# Altium PCB PCB1.PcbDoc (part 2 of 3)
Units mm, origin at the board's own origin, x right, y up, seen from the top; angles counter-clockwise.
Board outline 85 x 53 mm, 2 copper layers (Top Layer, Bottom Layer); 9 components, 0 nets, 22 pads, 70 vias.
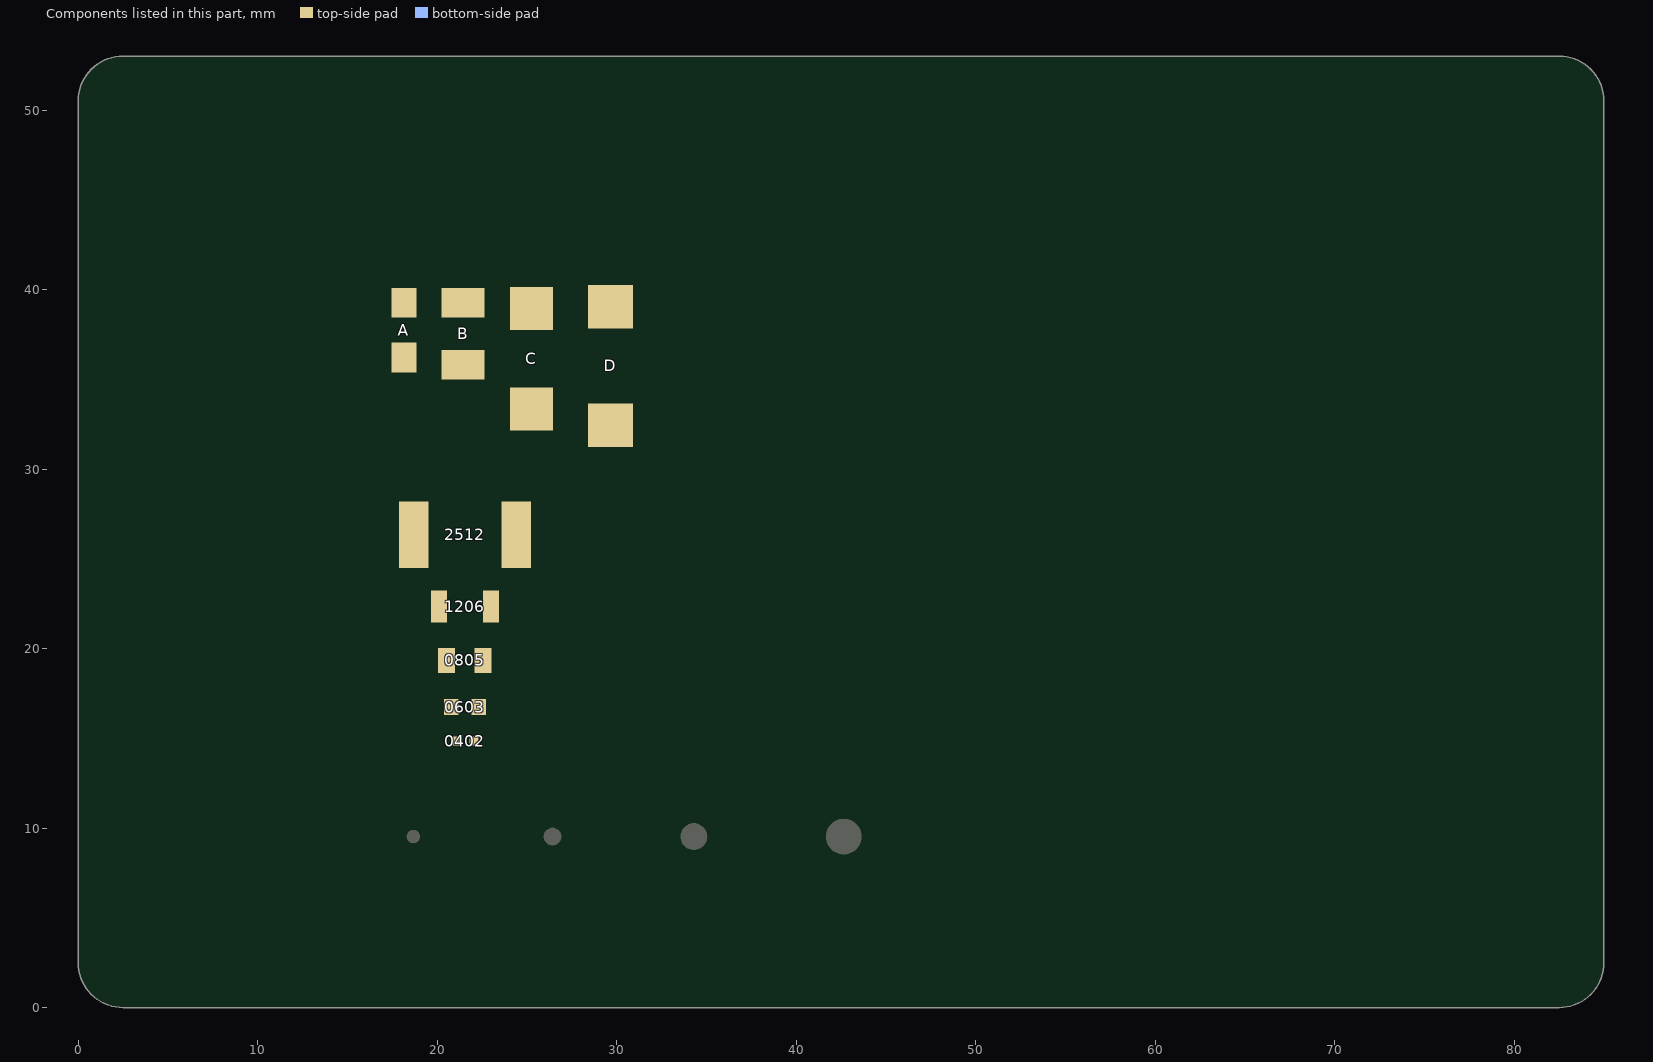
[diagram p2: the components of this part, seen from the top]

## Via types
v1: diameter 1.5, hole 0.9, Top Layer to Bottom Layer, 40 vias
v2: diameter 1.5, hole 1.1, Top Layer to Bottom Layer, 4 vias
v3: diameter 1.1, hole 1.1, Top Layer to Bottom Layer, 2 vias
v4: diameter 2.7, hole 2.2, Top Layer to Bottom Layer, 1 vias
v5: diameter 5.8, hole 5.3, Top Layer to Bottom Layer, 1 vias
v6: diameter 4.8, hole 4.3, Top Layer to Bottom Layer, 1 vias
v7: diameter 3.7, hole 3.2, Top Layer to Bottom Layer, 1 vias
v8: diameter 3.2, hole 2.7, Top Layer to Bottom Layer, 1 vias
v9: diameter 0.8, hole 0.3, Top Layer to Bottom Layer, 1 vias
v10: diameter 0.9, hole 0.4, Top Layer to Bottom Layer, 1 vias
v11: diameter 1, hole 0.5, Top Layer to Bottom Layer, 1 vias
v12: diameter 1.1, hole 0.6, Top Layer to Bottom Layer, 1 vias
v13: diameter 1.2, hole 0.7, Top Layer to Bottom Layer, 1 vias
v14: diameter 1.3, hole 0.8, Top Layer to Bottom Layer, 1 vias
v15: diameter 1.4, hole 0.9, Top Layer to Bottom Layer, 1 vias
v16: diameter 1.5, hole 1, Top Layer to Bottom Layer, 1 vias
v17: diameter 1.6, hole 1.1, Top Layer to Bottom Layer, 1 vias
v18: diameter 1.7, hole 1.2, Top Layer to Bottom Layer, 1 vias
v19: diameter 1.8, hole 1.3, Top Layer to Bottom Layer, 1 vias
v20: diameter 1.9, hole 1.4, Top Layer to Bottom Layer, 1 vias
v21: diameter 1.9, hole 1.5, Top Layer to Bottom Layer, 1 vias
v22: diameter 2.1, hole 1.6, Top Layer to Bottom Layer, 1 vias
v23: diameter 2.2, hole 1.7, Top Layer to Bottom Layer, 1 vias
v24: diameter 2.3, hole 1.8, Top Layer to Bottom Layer, 1 vias
v25: diameter 2.5, hole 2, Top Layer to Bottom Layer, 1 vias
v26: diameter 2.4, hole 1.9, Top Layer to Bottom Layer, 1 vias
v27: diameter 6.9, hole 6.4, Top Layer to Bottom Layer, 1 vias

## Nets (pads, with @x,y where several pads share a name; then routed paths per layer and width w, separated by ;. In a path a pad name is that pad's centre, name@x,y a point inside that pad or via, vN(x,y) a via of type N, cw(c..) or ccw(c..) an arc to the next point about the centre after c; other vN are vias at no path point) (continued)
copper on no net: (continued)
  Bottom Layer w0.05: 8.086,18.326 8.213,18.326 ; 8.086,18.351 8.213,18.351 ; 8.086,18.377 8.213,18.377 ; 8.086,18.402 8.213,18.402 ; 8.086,18.428 8.213,18.428 ; 8.086,18.453 8.238,18.453 ; 8.086,18.478 8.289,18.478 ; 8.086,18.504 8.34,18.504 ; 8.086,18.529 8.416,18.529 ; 8.086,18.555 8.187,18.555 ; 8.086,18.58 8.187,18.58 ; 8.086,18.605 8.187,18.605 ; 8.086,18.631 8.213,18.631 ; 8.086,18.656 8.213,18.656 ; 8.086,18.682 8.213,18.682 ; 8.086,18.707 8.213,18.707 ; 8.111,18.174 8.238,18.174 ; 8.111,18.199 8.238,18.199 ; 8.111,18.224 8.213,18.224 ; 8.111,18.25 8.213,18.25 ; 8.111,18.275 8.213,18.275 ; 8.111,18.301 8.213,18.301 ; 8.111,18.732 8.213,18.732 ; 8.111,18.758 8.213,18.758 ; 8.111,18.783 8.213,18.783 ; 8.111,18.809 8.213,18.809 ; 8.111,18.834 8.238,18.834 ; 8.111,18.859 8.238,18.859 ; 8.111,18.885 8.238,18.885 ; 8.136,18.047 8.263,18.047 ; 8.136,18.072 8.263,18.072 ; 8.136,18.097 8.238,18.097 ; 8.136,18.123 8.238,18.123 ; 8.136,18.148 8.238,18.148 ; 8.136,18.91 8.238,18.91 ; 8.136,18.936 8.238,18.936 ; 8.136,18.961 8.263,18.961 ; 8.136,18.986 8.263,18.986 ; 8.162,17.945 8.289,17.945 ; 8.162,17.97 8.289,17.97 ; 8.162,17.996 8.289,17.996 ; 8.162,18.021 8.263,18.021 ; 8.162,19.012 8.263,19.012 ; 8.162,19.037 8.263,19.037 ; 8.162,19.063 8.289,19.063 ; 8.162,19.088 8.289,19.088 ; 8.187,17.869 8.39,17.869 ; 8.187,17.894 8.416,17.894 ; 8.187,17.92 8.467,17.92 ; 8.187,19.113 8.289,19.113 ; 8.187,19.139 8.314,19.139 ; 8.187,19.164 8.416,19.164 ; 8.213,17.793 8.34,17.793 ; 8.213,17.818 8.34,17.818 ; 8.213,17.843 8.365,17.843 ; 8.213,18.555 8.848,18.555 ; 8.213,19.19 8.771,19.19 ; 8.213,19.215 8.721,19.215 ; 8.213,19.24 8.67,19.24 ; 8.238,17.742 8.365,17.742 ; 8.238,17.767 8.365,17.767 ; 8.238,19.266 8.365,19.266 ; 8.238,19.291 8.365,19.291 ; 8.263,17.691 8.39,17.691 ; 8.263,17.716 8.39,17.716 ; 8.263,18.58 8.873,18.58 ; 8.263,19.317 8.39,19.317 ; 8.263,19.342 8.39,19.342 ; 8.263,19.367 8.416,19.367 ; 8.289,17.615 8.441,17.615 ; 8.289,17.64 8.416,17.64 ; 8.289,17.666 8.416,17.666 ; 8.289,19.393 8.416,19.393 ; 8.289,19.418 8.441,19.418 ; 8.314,17.564 8.467,17.564 ; 8.314,17.589 8.441,17.589 ; 8.314,17.945 8.492,17.945 ; 8.314,18.605 8.67,18.605 ; 8.314,19.444 8.441,19.444 ; 8.314,19.469 8.467,19.469 ; 8.34,17.539 8.467,17.539 ; 8.34,17.97 8.568,17.97 ; 8.34,19.494 8.467,19.494 ; 8.34,19.52 8.492,19.52 ; 8.365,17.488 8.492,17.488 ; 8.365,17.513 8.492,17.513 ; 8.365,19.545 8.492,19.545 ; 8.365,19.571 8.517,19.571 ; 8.39,17.437 8.543,17.437 ; 8.39,17.462 8.517,17.462 ; 8.39,17.996 8.644,17.996 ; 8.39,19.596 8.517,19.596 ; 8.416,17.386 8.568,17.386 ; 8.416,17.412 8.543,17.412 ; 8.416,18.021 8.975,18.021 ; 8.416,19.621 8.543,19.621 ; 8.416,19.647 8.568,19.647 ; 8.441,17.361 8.721,17.361 ; 8.441,18.631 8.543,18.631 ; 8.441,19.672 8.568,19.672 ; 8.441,19.698 8.594,19.698 ; 8.467,17.31 8.695,17.31 ; 8.467,17.335 8.695,17.335 ; 8.467,18.047 8.949,18.047 ; 8.467,19.723 8.619,19.723 ; 8.492,17.285 8.67,17.285 ; 8.492,19.748 8.619,19.748 ; 8.492,19.774 8.644,19.774 ; 8.517,17.234 8.67,17.234 ; 8.517,17.259 8.644,17.259 ; 8.517,19.799 8.975,19.799 ; 8.543,17.208 8.695,17.208 ; 8.543,18.072 8.797,18.072 ; 8.543,19.825 8.924,19.825 ; 8.543,19.85 8.848,19.85 ; 8.568,17.158 8.721,17.158 ; 8.568,17.183 8.721,17.183 ; 8.568,19.164 8.797,19.164 ; 8.568,19.875 8.721,19.875 ; 8.594,17.132 8.746,17.132 ; 8.594,18.529 8.848,18.529 ; 8.594,19.901 8.746,19.901 ; 8.619,17.107 8.771,17.107 ; 8.619,17.386 8.746,17.386 ; 8.619,17.412 8.771,17.412 ; 8.619,19.926 8.746,19.926 ; 8.619,19.952 8.771,19.952 ; 8.644,17.056 8.822,17.056 ; 8.644,17.081 8.797,17.081 ; 8.644,17.437 8.797,17.437 ; 8.644,19.977 8.797,19.977 ; 8.67,17.031 8.822,17.031 ; 8.67,17.462 8.848,17.462 ; 8.67,18.504 8.848,18.504 ; 8.67,19.139 8.848,19.139 ; 8.67,20.002 8.822,20.002 ; 8.695,17.005 8.848,17.005 ; 8.695,17.488 8.898,17.488 ; 8.695,19.113 9.025,19.113 ; 8.695,20.028 8.848,20.028 ; 8.695,20.053 8.873,20.053 ; 8.721,16.98 8.873,16.98 ; 8.721,17.513 9,17.513 ; 8.721,17.996 8.975,17.996 ; 8.721,18.478 8.873,18.478 ; 8.721,20.079 8.873,20.079 ; 8.746,16.954 9,16.954 ; 8.746,18.428 8.873,18.428 ; 8.746,18.453 8.873,18.453 ; 8.746,18.605 8.873,18.605 ; 8.746,18.631 8.873,18.631 ; 8.746,19.088 9,19.088 ; 8.746,19.774 9.025,19.774 ; 8.746,20.104 8.898,20.104 ; 8.771,16.904 8.975,16.904 ; 8.771,16.929 8.975,16.929 ; 8.771,17.539 9.229,17.539 ; 8.771,18.25 8.898,18.25 ; 8.771,18.275 8.898,18.275 ; 8.771,18.301 8.898,18.301 ; 8.771,18.326 8.873,18.326 ; 8.771,18.351 8.873,18.351 ; 8.771,18.377 8.873,18.377 ; 8.771,18.402 8.873,18.402 ; 8.771,18.656 8.873,18.656 ; 8.771,18.682 8.873,18.682 ; 8.771,18.707 8.873,18.707 ; 8.771,18.732 8.873,18.732 ; 8.771,18.758 8.898,18.758 ; 8.771,18.783 8.898,18.783 ; 8.771,18.809 8.898,18.809 ; 8.771,19.063 9,19.063 ; 8.771,20.129 8.924,20.129 ; 8.797,16.878 8.949,16.878 ; 8.797,17.97 9,17.97 ; 8.797,18.148 8.924,18.148 ; 8.797,18.174 8.924,18.174 ; 8.797,18.199 8.924,18.199 ; 8.797,18.224 8.898,18.224 ; 8.797,18.834 8.898,18.834 ; 8.797,18.859 8.924,18.859 ; 8.797,18.885 8.924,18.885 ; 8.797,18.91 8.924,18.91 ; 8.797,19.037 8.975,19.037 ; 8.797,20.155 8.949,20.155 ; 8.822,16.853 8.949,16.853 ; 8.822,17.564 9.203,17.564 ; 8.822,18.072 8.949,18.072 ; 8.822,18.097 8.949,18.097 ; 8.822,18.123 8.924,18.123 ; 8.822,18.936 8.949,18.936 ; 8.822,18.961 8.949,18.961 ; 8.822,18.986 8.949,18.986 ; 8.822,19.012 8.975,19.012 ; 8.822,20.18 8.975,20.18 ; 8.848,13.297 8.975,13.297 ; 8.848,13.322 8.975,13.322 ; 8.848,13.348 8.949,13.348 ; 8.848,13.373 8.949,13.373 ; 8.848,13.398 8.975,13.398 ; 8.848,13.424 8.975,13.424 ; 8.848,16.802 8.975,16.802 ; 8.848,16.827 8.975,16.827 ; 8.848,17.945 9,17.945 ; 8.848,19.748 9.051,19.748 ; 8.848,20.206 9,20.206 ; 8.873,13.246 9.051,13.246 ; 8.873,13.271 9.025,13.271 ; 8.873,13.449 8.975,13.449 ; 8.873,13.475 9,13.475 ; 8.873,13.5 9,13.5 ; 8.873,16.751 9,16.751 ; 8.873,16.777 9,16.777 ; 8.873,17.92 9,17.92 ; 8.873,20.231 9.025,20.231 ; 8.898,13.221 9.102,13.221 ; 8.898,13.525 9.025,13.525 ; 8.898,13.551 9.051,13.551 ; 8.898,16.7 9.025,16.7 ; 8.898,16.726 9.025,16.726 ; 8.898,16.98 9.025,16.98 ; 8.898,17.005 9.051,17.005 ; 8.898,17.589 9.178,17.589 ; 8.898,17.869 9.025,17.869 ; 8.898,17.894 9.025,17.894 ; 8.898,19.139 9.025,19.139 ; 8.898,19.164 9.051,19.164 ; 8.898,19.723 9.102,19.723 ; 8.898,20.256 9.076,20.256 ; 8.924,13.195 9.178,13.195 ; 8.924,13.576 9.051,13.576 ; 8.924,13.602 9.076,13.602 ; 8.924,16.65 9.051,16.65 ; 8.924,16.675 9.051,16.675 ; 8.924,17.031 9.051,17.031 ; 8.924,17.818 9.051,17.818 ; 8.924,17.843 9.051,17.843 ; 8.924,19.19 9.051,19.19 ; 8.924,19.215 9.076,19.215 ; 8.924,20.282 9.102,20.282 ; 8.949,13.17 9.254,13.17 ; 8.949,13.627 9.102,13.627 ; 8.949,16.599 9.076,16.599 ; 8.949,16.624 9.076,16.624 ; 8.949,17.056 9.076,17.056 ; 8.949,17.767 9.076,17.767 ; 8.949,17.793 9.076,17.793 ; 8.949,19.24 9.076,19.24 ; 8.949,19.698 9.127,19.698 ; 8.949,20.307 9.152,20.307 ; 8.975,13.652 9.127,13.652 ; 8.975,13.678 9.127,13.678 ; 8.975,16.548 9.127,16.548 ; 8.975,16.573 9.102,16.573 ; 8.975,17.081 9.102,17.081 ; 8.975,17.716 9.102,17.716 ; 8.975,17.742 9.102,17.742 ; 8.975,19.266 9.102,19.266 ; 8.975,19.291 9.127,19.291 ; 8.975,20.333 9.432,20.333 ; 9,13.144 9.356,13.144 ; 9,13.703 9.152,13.703 ; 9,16.497 9.152,16.497 ; 9,16.523 9.127,16.523 ; 9,17.107 9.127,17.107 ; 9,17.666 9.152,17.666 ; 9,17.691 9.127,17.691 ; 9,19.317 9.127,19.317 ; 9,19.342 9.152,19.342 ; 9,19.672 9.127,19.672 ; 9,20.358 9.406,20.358 ; 9.025,13.729 9.178,13.729 ; 9.025,16.472 9.178,16.472 ; 9.025,17.132 9.178,17.132 ; 9.025,17.513 9.229,17.513 ; 9.025,17.615 9.178,17.615 ; 9.025,17.64 9.152,17.64 ; 9.025,19.367 9.178,19.367 ; 9.025,19.647 9.152,19.647 ; 9.051,13.119 9.483,13.119 ; 9.051,13.754 9.203,13.754 ; 9.051,16.421 9.406,16.421 ; 9.051,16.446 9.178,16.446 ; 9.051,17.158 9.203,17.158 ; 9.051,19.393 9.203,19.393 ; 9.051,19.621 9.178,19.621 ; 9.051,20.383 9.381,20.383 ; 9.076,13.779 9.254,13.779 ; 9.076,16.218 9.203,16.218 ; 9.076,16.243 9.203,16.243 ; 9.076,16.269 9.178,16.269 ; 9.076,16.294 9.178,16.294 ; 9.076,16.319 9.33,16.319 ; 9.076,16.345 9.356,16.345 ; 9.076,16.37 9.356,16.37 ; 9.076,16.396 9.381,16.396 ; 9.076,17.183 9.254,17.183 ; 9.076,19.418 9.203,19.418 ; 9.076,19.444 9.229,19.444 ; 9.076,19.571 9.356,19.571 ; 9.076,19.596 9.178,19.596 ; 9.076,20.409 9.305,20.409 ; 9.102,13.805 9.279,13.805 ; 9.102,16.142 9.254,16.142 ; 9.102,16.167 9.229,16.167 ; 9.102,16.192 9.203,16.192 ; 9.102,17.208 9.279,17.208 ; 9.102,17.488 9.254,17.488 ; 9.102,19.469 9.254,19.469 ; 9.102,19.494 9.66,19.494 ; 9.102,19.52 9.457,19.52 ; 9.102,19.545 9.406,19.545 ; 9.102,20.434 9.229,20.434 ; 9.102,20.46 9.229,20.46 ; 9.102,20.485 9.254,20.485 ; 9.127,13.094 9.635,13.094 ; 9.127,13.83 9.305,13.83 ; 9.127,16.116 9.33,16.116 ; 9.127,17.234 9.635,17.234 ; 9.127,17.462 9.279,17.462 ; 9.127,20.51 9.254,20.51 ; 9.127,20.536 9.279,20.536 ; 9.152,13.856 9.356,13.856 ; 9.152,16.091 9.61,16.091 ; 9.152,17.437 9.305,17.437 ; 9.152,20.561 9.305,20.561 ; 9.178,13.881 9.381,13.881 ; 9.178,16.065 9.584,16.065 ; 9.178,17.259 9.559,17.259 ; 9.178,17.386 9.33,17.386 ; 9.178,17.412 9.305,17.412 ; 9.178,20.587 9.33,20.587 ; 9.178,20.612 9.584,20.612 ; 9.203,13.068 9.889,13.068 ; 9.203,13.906 9.432,13.906 ; 9.203,16.04 9.533,16.04 ; 9.203,16.294 9.33,16.294 ; 9.203,16.446 9.432,16.446 ; 9.203,17.361 9.356,17.361 ; 9.203,20.637 9.559,20.637 ; 9.229,16.269 9.33,16.269 ; 9.229,16.472 9.483,16.472 ; 9.229,17.285 9.508,17.285 ; 9.229,17.335 9.381,17.335 ; 9.229,19.596 9.356,19.596 ; 9.229,20.663 9.508,20.663 ; 9.254,13.932 9.483,13.932 ; 9.254,16.015 9.483,16.015 ; 9.254,16.167 9.305,16.167 ; 9.254,16.192 9.33,16.192 ; 9.254,16.218 9.33,16.218 ; 9.254,16.243 9.33,16.243 ; 9.254,16.497 9.635,16.497 ; 9.254,17.31 9.432,17.31 ; 9.254,19.621 9.381,19.621 ; 9.279,13.957 9.533,13.957 ; 9.279,16.523 9.61,16.523 ; 9.279,19.647 9.432,19.647 ; 9.279,20.688 9.432,20.688 ; 9.305,13.043 10.778,13.043 ; 9.305,16.548 9.635,16.548 ; 9.305,19.469 9.635,19.469 ; 9.305,19.672 9.457,19.672 ; 9.305,20.307 9.457,20.307 ; 9.305,20.714 9.406,20.714 ; 9.305,20.739 9.406,20.739 ; 9.305,20.764 9.406,20.764 ; 9.305,20.79 9.406,20.79 ; 9.305,20.815 9.406,20.815 ; 9.305,20.841 9.61,20.841 ; 9.305,20.866 9.559,20.866 ; 9.305,20.891 9.508,20.891 ; 9.305,20.917 9.457,20.917 ; 9.305,20.942 9.432,20.942 ; 9.305,20.968 9.432,20.968 ; 9.33,13.983 9.61,13.983 ; 9.33,16.573 9.66,16.573 ; 9.33,19.444 9.584,19.444 ; 9.33,19.698 9.483,19.698 ; 9.33,20.282 9.483,20.282 ; 9.33,20.993 9.457,20.993 ; 9.33,21.018 9.483,21.018 ; 9.356,16.599 9.686,16.599 ; 9.356,19.723 9.508,19.723 ; 9.356,20.256 9.483,20.256 ; 9.356,21.044 9.483,21.044 ; 9.381,14.008 9.787,14.008 ; 9.381,17.208 9.686,17.208 ; 9.381,19.748 9.508,19.748 ; 9.381,20.231 9.508,20.231 ; 9.381,21.069 9.508,21.069 ; 9.381,21.095 9.533,21.095 ; 9.406,13.017 10.676,13.017 ; 9.406,16.624 9.737,16.624 ; 9.406,19.418 9.559,19.418 ; 9.406,19.774 9.508,19.774 ; 9.406,20.18 9.508,20.18 ; 9.406,20.206 9.508,20.206 ; 9.406,21.12 9.559,21.12 ; 9.432,14.033 9.762,14.033 ; 9.432,16.116 9.686,16.116 ; 9.432,16.65 9.762,16.65 ; 9.432,19.799 9.533,19.799 ; 9.432,19.825 9.533,19.825 ; 9.432,19.85 9.533,19.85 ; 9.432,19.875 9.533,19.875 ; 9.432,20.104 9.533,20.104 ; 9.432,20.129 9.533,20.129 ; 9.432,20.155 9.533,20.155 ; 9.432,20.587 9.61,20.587 ; 9.432,21.145 9.584,21.145 ; 9.457,16.675 9.914,16.675 ; 9.457,17.183 9.737,17.183 ; 9.457,19.24 9.584,19.24 ; 9.457,19.266 9.584,19.266 ; 9.457,19.291 9.584,19.291 ; 9.457,19.317 9.559,19.317 ; 9.457,19.342 9.559,19.342 ; 9.457,19.367 9.559,19.367 ; 9.457,19.393 9.559,19.393 ; 9.457,19.901 9.533,19.901 ; 9.457,19.926 9.533,19.926 ; 9.457,19.952 9.533,19.952 ; 9.457,19.977 9.533,19.977 ; 9.457,20.002 9.533,20.002 ; 9.457,20.028 9.533,20.028 ; 9.457,20.053 9.533,20.053 ; 9.457,20.079 9.533,20.079 ; 9.457,20.815 9.66,20.815 ; 9.457,21.171 9.61,21.171 ; 9.483,14.059 9.762,14.059 ; 9.483,16.142 9.762,16.142 ; 9.483,16.7 9.914,16.7 ; 9.483,19.037 9.61,19.037 ; 9.483,19.063 9.61,19.063 ; 9.483,19.088 9.584,19.088 ; 9.483,19.113 9.584,19.113 ; 9.483,19.139 9.584,19.139 ; 9.483,19.164 9.584,19.164 ; 9.483,19.19 9.584,19.19 ; 9.483,19.215 9.584,19.215 ; 9.483,20.561 9.635,20.561 ; 9.483,21.196 9.635,21.196 ; 9.508,17.158 9.762,17.158 ; 9.508,18.809 9.635,18.809 ; 9.508,18.834 9.635,18.834 ; 9.508,18.859 9.635,18.859 ; 9.508,18.885 9.61,18.885 ; 9.508,18.91 9.61,18.91 ; 9.508,18.936 9.61,18.936 ; 9.508,18.961 9.61,18.961 ; 9.508,18.986 9.61,18.986 ; 9.508,19.012 9.61,19.012 ; 9.508,19.52 9.686,19.52 ; 9.508,20.536 9.635,20.536 ; 9.508,20.79 9.737,20.79 ; 9.508,21.222 9.66,21.222 ; 9.508,21.247 9.686,21.247 ; 9.533,16.167 9.813,16.167 ; 9.533,16.472 9.635,16.472 ; 9.533,16.726 9.94,16.726 ; 9.533,18.605 9.66,18.605 ; 9.533,18.631 9.66,18.631 ; 9.533,18.656 9.635,18.656 ; 9.533,18.682 9.635,18.682 ; 9.533,18.707 9.635,18.707 ; 9.533,18.732 9.635,18.732 ; 9.533,18.758 9.635,18.758 ; 9.533,18.783 9.635,18.783 ; 9.533,20.51 9.66,20.51 ; 9.533,21.272 9.711,21.272 ; 9.559,14.084 9.787,14.084 ; 9.559,16.192 9.864,16.192 ; 9.559,16.218 9.889,16.218 ; 9.559,16.396 9.66,16.396 ; 9.559,16.421 9.66,16.421 ; 9.559,16.446 9.66,16.446 ; 9.559,16.751 10.118,16.751 ; 9.559,17.132 9.813,17.132 ; 9.559,18.377 9.686,18.377 ; 9.559,18.402 9.686,18.402 ; 9.559,18.428 9.686,18.428 ; 9.559,18.453 9.66,18.453 ; 9.559,18.478 9.66,18.478 ; 9.559,18.504 9.66,18.504 ; 9.559,18.529 9.66,18.529 ; 9.559,18.555 9.66,18.555 ; 9.559,18.58 9.66,18.58 ; 9.559,19.545 9.686,19.545 ; 9.559,20.485 9.686,20.485 ; 9.559,20.764 9.787,20.764 ; 9.559,21.298 9.737,21.298 ; 9.584,12.992 10.499,12.992 ; 9.584,16.243 9.66,16.243 ; 9.584,16.269 9.66,16.269 ; 9.584,16.294 9.686,16.294 ; 9.584,16.319 9.66,16.319 ; 9.584,16.345 9.66,16.345 ; 9.584,16.37 9.66,16.37 ; 9.584,18.174 9.711,18.174 ; 9.584,18.199 9.711,18.199 ; 9.584,18.224 9.686,18.224 ; 9.584,18.25 9.686,18.25 ; 9.584,18.275 9.686,18.275 ; 9.584,18.301 9.686,18.301 ; 9.584,18.326 9.686,18.326 ; 9.584,18.351 9.686,18.351 ; 9.584,19.571 9.711,19.571 ; 9.584,20.434 9.711,20.434 ; 9.584,20.46 9.686,20.46 ; 9.61,16.777 9.813,16.777 ; 9.61,17.107 9.838,17.107 ; 9.61,17.97 9.737,17.97 ; 9.61,17.996 9.737,17.996 ; 9.61,18.021 9.711,18.021 ; 9.61,18.047 9.711,18.047 ; 9.61,18.072 9.711,18.072 ; 9.61,18.097 9.711,18.097 ; 9.61,18.123 9.711,18.123 ; 9.61,18.148 9.711,18.148 ; 9.61,19.596 9.711,19.596 ; 9.61,20.383 9.737,20.383 ; 9.61,20.409 9.711,20.409 ; 9.61,20.739 9.864,20.739 ; 9.61,21.323 9.787,21.323 ; 9.635,14.11 9.813,14.11 ; 9.635,17.742 9.762,17.742 ; 9.635,17.767 9.762,17.767 ; 9.635,17.793 9.762,17.793 ; 9.635,17.818 9.737,17.818 ; 9.635,17.843 9.737,17.843 ; 9.635,17.869 9.737,17.869 ; 9.635,17.894 9.737,17.894 ; 9.635,17.92 9.737,17.92 ; 9.635,17.945 9.737,17.945 ; 9.635,19.621 9.737,19.621 ; 9.635,19.647 9.737,19.647 ; 9.635,20.333 9.737,20.333 ; 9.635,20.358 9.737,20.358 ; 9.635,21.349 9.813,21.349 ; 9.66,14.135 9.813,14.135 ; 9.66,16.802 10.092,16.802 ; 9.66,17.081 9.889,17.081 ; 9.66,17.539 9.787,17.539 ; 9.66,17.564 9.787,17.564 ; 9.66,17.589 9.762,17.589 ; 9.66,17.615 9.762,17.615 ; 9.66,17.64 9.762,17.64 ; 9.66,17.666 9.762,17.666 ; 9.66,17.691 9.762,17.691 ; 9.66,17.716 9.762,17.716 ; 9.66,19.672 9.762,19.672 ; 9.66,19.698 9.762,19.698 ; 9.66,19.723 9.762,19.723 ; 9.66,20.256 9.762,20.256 ; 9.66,20.282 9.762,20.282 ; 9.66,20.307 9.762,20.307 ; 9.66,20.714 9.94,20.714 ; 9.66,21.374 9.864,21.374 ; 9.686,13.983 9.813,13.983 ; 9.686,14.16 9.838,14.16 ; 9.686,17.386 9.838,17.386 ; 9.686,17.412 9.813,17.412 ; 9.686,17.437 9.787,17.437 ; 9.686,17.462 9.787,17.462 ; 9.686,17.488 9.787,17.488 ; 9.686,17.513 9.787,17.513 ; 9.686,19.748 9.762,19.748 ; 9.686,19.774 9.762,19.774 ; 9.686,19.799 9.787,19.799 ; 9.686,19.825 9.787,19.825 ; 9.686,19.85 9.787,19.85 ; 9.686,19.875 9.787,19.875 ; 9.686,20.129 9.787,20.129 ; 9.686,20.155 9.787,20.155 ; 9.686,20.18 9.787,20.18 ; 9.686,20.206 9.787,20.206 ; 9.686,20.231 9.762,20.231 ; 9.686,21.399 9.889,21.399 ; 9.711,13.932 9.889,13.932 ; 9.711,13.957 9.838,13.957 ; 9.711,14.186 9.864,14.186 ; 9.711,16.243 9.914,16.243 ; 9.711,16.827 10.092,16.827 ; 9.711,17.056 9.914,17.056 ; 9.711,17.335 9.889,17.335 ; 9.711,17.361 9.864,17.361 ; 9.711,19.901 9.787,19.901 ; 9.711,19.926 9.787,19.926 ; 9.711,19.952 9.787,19.952 ; 9.711,19.977 9.787,19.977 ; 9.711,20.002 9.787,20.002 ; 9.711,20.028 9.787,20.028 ; 9.711,20.053 9.787,20.053 ; 9.711,20.079 9.787,20.079 ; 9.711,20.104 9.787,20.104 ; 9.737,13.906 9.94,13.906 ; 9.737,14.211 9.889,14.211 ; 9.737,17.31 9.94,17.31 ; 9.737,20.688 10.041,20.688 ; 9.737,21.425 9.94,21.425 ; 9.762,13.881 10.067,13.881 ; 9.762,14.237 9.914,14.237 ; 9.762,16.269 9.94,16.269 ; 9.762,16.853 10.092,16.853 ; 9.762,17.031 9.94,17.031 ; 9.762,17.285 9.965,17.285 ; 9.762,21.45 10.016,21.45 ; 9.787,12.967 10.245,12.967 ; 9.787,14.262 9.94,14.262 ; 9.787,16.294 9.991,16.294 ; 9.787,17.005 9.991,17.005 ; 9.787,17.259 10.041,17.259 ; 9.787,20.663 10.118,20.663 ; 9.813,13.856 10.448,13.856 ; 9.813,14.287 9.965,14.287 ; 9.813,14.313 9.991,14.313 ; 9.813,16.319 10.016,16.319 ; 9.813,21.476 10.143,21.476 ; 9.838,14.338 9.991,14.338 ; 9.838,16.345 10.067,16.345 ; 9.838,16.599 9.94,16.599 ; 9.838,16.624 9.94,16.624 ; 9.838,16.65 9.94,16.65 ; 9.838,16.777 10.092,16.777 ; 9.838,16.878 10.092,16.878 ; 9.838,16.98 10.016,16.98 ; 9.838,17.234 10.092,17.234 ; 9.864,13.83 10.372,13.83 ; 9.864,14.364 10.016,14.364 ; 9.864,16.37 10.092,16.37 ; 9.864,16.396 10.118,16.396 ; 9.864,16.421 10.118,16.421 ; 9.864,16.523 9.965,16.523 ; 9.864,16.548 9.965,16.548 ; 9.864,16.573 9.965,16.573 ; 9.864,16.954 10.041,16.954 ; 9.864,17.208 10.143,17.208 ; 9.864,20.637 10.245,20.637 ; 9.864,21.501 10.143,21.501 ; 9.889,14.389 10.194,14.389 ; 9.889,16.446 9.965,16.446 ; 9.889,16.472 9.965,16.472 ; 9.889,16.497 9.965,16.497 ; 9.889,16.929 10.067,16.929 ; 9.914,14.414 10.168,14.414 ; 9.914,16.904 10.067,16.904 ; 9.914,17.183 10.219,17.183 ; 9.914,21.526 10.143,21.526 ; 9.94,14.44 10.143,14.44 ; 9.94,14.465 10.118,14.465 ; 9.965,13.805 10.27,13.805 ; 9.965,14.491 10.118,14.491 ; 9.965,17.158 10.321,17.158 ; 9.965,20.612 10.372,20.612 ; 9.965,21.552 10.143,21.552 ; 9.991,14.516 10.143,14.516 ; 9.991,16.446 10.143,16.446 ; 9.991,16.726 10.118,16.726 ; 9.991,22.39 10.118,22.39 ; 9.991,22.415 10.118,22.415 ; 9.991,22.441 10.118,22.441 ; 9.991,22.466 10.118,22.466 ; 9.991,22.492 10.118,22.492 ; 9.991,22.517 10.118,22.517 ; 9.991,22.542 10.092,22.542 ; 9.991,22.568 10.092,22.568 ; 9.991,22.593 10.092,22.593 ; 9.991,22.619 10.092,22.619 ; 9.991,22.644 10.092,22.644 ; 9.991,22.669 10.092,22.669 ; 9.991,22.695 10.092,22.695 ; 9.991,22.72 10.092,22.72 ; 9.991,22.746 10.092,22.746 ; 9.991,22.771 10.092,22.771 ; 9.991,22.796 10.092,22.796 ; 9.991,22.822 10.092,22.822 ; 9.991,22.847 10.092,22.847 ; 9.991,22.873 10.092,22.873 ; 9.991,22.898 10.092,22.898 ; 9.991,22.923 10.092,22.923 ; 9.991,22.949 10.092,22.949 ; 9.991,22.974 10.092,22.974 ; 9.991,23 10.092,23 ; 9.991,23.025 10.092,23.025 ; 9.991,23.05 10.092,23.05 ; 9.991,23.076 10.092,23.076 ; 9.991,23.101 10.092,23.101 ; 9.991,23.127 10.092,23.127 ; 9.991,23.152 10.092,23.152 ; 9.991,23.177 10.092,23.177 ; 9.991,23.203 10.092,23.203 ; 9.991,23.228 10.092,23.228 ; 9.991,23.254 10.092,23.254 ; 9.991,23.279 10.092,23.279 ; 9.991,23.304 10.092,23.304 ; 9.991,23.33 10.092,23.33 ; 9.991,23.355 10.092,23.355 ; 9.991,23.381 10.092,23.381 ; 9.991,23.406 10.092,23.406 ; 9.991,23.431 10.092,23.431 ; 9.991,23.457 10.092,23.457 ; 9.991,23.482 10.092,23.482 ; 9.991,23.508 10.092,23.508 ; 9.991,23.533 10.092,23.533 ; 9.991,23.558 10.092,23.558 ; 9.991,23.584 10.092,23.584 ; 9.991,23.609 10.092,23.609 ; 9.991,23.635 10.092,23.635 ; 9.991,23.66 10.092,23.66 ; 9.991,23.685 10.092,23.685 ; 9.991,23.711 10.092,23.711 ; 9.991,23.736 10.092,23.736 ; 9.991,23.762 10.092,23.762 ; 9.991,23.787 10.092,23.787 ; 9.991,23.812 10.092,23.812 ; 9.991,23.838 10.092,23.838 ; 9.991,23.863 10.092,23.863 ; 9.991,23.889 10.092,23.889 ; 9.991,23.914 10.092,23.914 ; 9.991,23.939 10.092,23.939 ; 9.991,23.965 10.092,23.965 ; 9.991,23.99 10.092,23.99 ; 9.991,24.016 10.118,24.016 ; 9.991,24.041 10.118,24.041 ; 9.991,24.066 10.118,24.066 ; 10.016,14.541 10.168,14.541 ; 10.016,14.567 10.168,14.567 ; 10.016,16.472 10.143,16.472 ; 10.016,16.675 10.143,16.675 ; 10.016,16.7 10.143,16.7 ; 10.016,17.132 10.422,17.132 ; 10.016,21.577 10.143,21.577 ; 10.016,21.603 10.143,21.603 ; 10.016,21.628 10.143,21.628 ; 10.016,21.653 10.143,21.653 ; 10.016,21.679 10.118,21.679 ; 10.016,21.704 10.118,21.704 ; 10.016,21.73 10.118,21.73 ; 10.016,21.755 10.118,21.755 ; 10.016,21.78 10.118,21.78 ; 10.016,21.806 10.118,21.806 ; 10.016,21.831 10.118,21.831 ; 10.016,21.857 10.118,21.857 ; 10.016,21.882 10.118,21.882 ; 10.016,21.907 10.118,21.907 ; 10.016,21.933 10.118,21.933 ; 10.016,21.958 10.118,21.958 ; 10.016,21.984 10.118,21.984 ; 10.016,22.009 10.118,22.009 ; 10.016,22.034 10.118,22.034 ; 10.016,22.06 10.118,22.06 ; 10.016,22.085 10.118,22.085 ; 10.016,22.111 10.118,22.111 ; 10.016,22.136 10.118,22.136 ; 10.016,22.161 10.118,22.161 ; 10.016,22.187 10.118,22.187 ; 10.016,22.212 10.118,22.212 ; 10.016,22.238 10.118,22.238 ; 10.016,22.263 10.118,22.263 ; 10.016,22.288 10.118,22.288 ; 10.016,22.314 10.118,22.314 ; 10.016,22.339 10.118,22.339 ; 10.016,22.365 10.118,22.365 ; 10.016,24.092 10.118,24.092 ; 10.016,24.117 10.118,24.117 ; 10.016,24.143 10.118,24.143 ; 10.016,24.168 10.118,24.168 ; 10.016,24.193 10.143,24.193 ; 10.016,24.219 10.143,24.219 ; 10.041,14.592 10.194,14.592 ; 10.041,16.497 10.143,16.497 ; 10.041,16.523 10.143,16.523 ; 10.041,16.548 10.143,16.548 ; 10.041,16.573 10.143,16.573 ; 10.041,16.599 10.143,16.599 ; 10.041,16.624 10.143,16.624 ; 10.041,16.65 10.143,16.65 ; 10.041,20.587 10.549,20.587 ; 10.041,21.45 10.194,21.45 ; 10.041,24.244 10.143,24.244 ; 10.041,24.27 10.143,24.27 ; 10.041,24.295 10.168,24.295 ; 10.041,24.32 10.168,24.32 ; 10.067,14.364 10.219,14.364 ; 10.067,14.618 10.219,14.618 ; 10.067,17.107 10.549,17.107 ; 10.067,21.425 10.219,21.425 ; 10.067,24.346 10.168,24.346 ; 10.067,24.371 10.194,24.371 ; 10.067,24.397 10.194,24.397 ; 10.092,14.338 10.245,14.338 ; 10.092,14.643 10.219,14.643 ; 10.092,14.668 10.245,14.668 ; 10.092,17.081 10.676,17.081 ; 10.092,19.545 10.194,19.545 ; 10.092,19.571 10.194,19.571 ; 10.092,19.596 10.194,19.596 ; 10.092,19.621 10.194,19.621 ; 10.092,19.647 10.194,19.647 ; 10.092,19.672 10.168,19.672 ; 10.092,19.698 10.168,19.698 ; 10.092,19.723 10.168,19.723 ; 10.092,19.748 10.168,19.748 ; 10.092,19.774 10.168,19.774 ; 10.092,19.799 10.168,19.799 ; 10.092,19.825 10.168,19.825 ; 10.092,19.85 10.168,19.85 ; 10.092,19.875 10.168,19.875 ; 10.092,19.901 10.168,19.901 ; 10.092,19.926 10.168,19.926 ; 10.092,19.952 10.168,19.952 ; 10.092,19.977 10.194,19.977 ; 10.092,20.002 10.245,20.002 ; 10.092,21.399 10.245,21.399 ; 10.092,24.422 10.219,24.422 ; 10.092,24.447 10.219,24.447 ; 10.118,14.313 10.27,14.313 ; 10.118,14.694 10.27,14.694 ; 10.118,17.031 10.245,17.031 ; 10.118,17.056 10.245,17.056 ; 10.118,19.215 10.219,19.215 ; 10.118,19.24 10.219,19.24 ; 10.118,19.266 10.219,19.266 ; 10.118,19.291 10.219,19.291 ; 10.118,19.317 10.219,19.317 ; 10.118,19.342 10.194,19.342 ; 10.118,19.367 10.194,19.367 ; 10.118,19.393 10.194,19.393 ; 10.118,19.418 10.194,19.418 ; 10.118,19.444 10.194,19.444 ; 10.118,19.469 10.194,19.469 ; 10.118,19.494 10.194,19.494 ; 10.118,19.52 10.194,19.52 ; 10.118,20.028 10.753,20.028 ; 10.118,21.374 10.295,21.374 ; 10.118,24.473 10.245,24.473 ; 10.118,24.498 10.245,24.498 ; 10.143,13.068 10.88,13.068 ; 10.143,13.881 10.676,13.881 ; 10.143,14.287 10.321,14.287 ; 10.143,14.719 10.27,14.719 ; 10.143,14.745 10.295,14.745 ; 10.143,16.98 10.295,16.98 ; 10.143,17.005 10.27,17.005 ; 10.143,18.859 10.245,18.859 ; 10.143,18.885 10.245,18.885 ; 10.143,18.91 10.245,18.91 ; 10.143,18.936 10.245,18.936 ; 10.143,18.961 10.245,18.961 ; 10.143,18.986 10.219,18.986 ; 10.143,19.012 10.219,19.012 ; 10.143,19.037 10.219,19.037 ; 10.143,19.063 10.219,19.063 ; 10.143,19.088 10.219,19.088 ; 10.143,19.113 10.219,19.113 ; 10.143,19.139 10.219,19.139 ; 10.143,19.164 10.219,19.164 ; 10.143,19.19 10.219,19.19 ; 10.143,20.053 10.524,20.053 ; 10.143,21.349 10.346,21.349 ; 10.143,24.524 10.27,24.524 ; 10.143,24.549 10.295,24.549 ; 10.168,14.262 10.397,14.262 ; 10.168,14.77 10.295,14.77 ; 10.168,16.929 10.321,16.929 ; 10.168,16.954 10.295,16.954 ; 10.168,18.504 10.27,18.504 ; 10.168,18.529 10.27,18.529 ; 10.168,18.555 10.27,18.555 ; 10.168,18.58 10.27,18.58 ; 10.168,18.605 10.27,18.605 ; 10.168,18.631 10.27,18.631 ; 10.168,18.656 10.245,18.656 ; 10.168,18.682 10.245,18.682 ; 10.168,18.707 10.245,18.707 ; 10.168,18.732 10.245,18.732 ; 10.168,18.758 10.245,18.758 ; 10.168,18.783 10.245,18.783 ; 10.168,18.809 10.245,18.809 ; 10.168,18.834 10.245,18.834 ; 10.168,20.079 10.346,20.079 ; 10.168,20.561 10.854,20.561 ; 10.168,24.574 10.321,24.574 ; 10.168,24.6 10.321,24.6 ; 10.194,14.237 10.778,14.237 ; 10.194,14.795 10.321,14.795 ; 10.194,14.821 10.346,14.821 ; 10.194,16.878 10.346,16.878 ; 10.194,16.904 10.321,16.904 ; 10.194,18.174 10.295,18.174 ; 10.194,18.199 10.295,18.199 ; 10.194,18.224 10.295,18.224 ; 10.194,18.25 10.295,18.25 ; 10.194,18.275 10.295,18.275 ; 10.194,18.301 10.27,18.301 ; 10.194,18.326 10.27,18.326 ; 10.194,18.351 10.27,18.351 ; 10.194,18.377 10.27,18.377 ; 10.194,18.402 10.27,18.402 ; 10.194,18.428 10.27,18.428 ; 10.194,18.453 10.27,18.453 ; 10.194,18.478 10.27,18.478 ; 10.194,21.323 10.397,21.323 ; 10.194,24.625 10.346,24.625 ; 10.219,14.846 10.549,14.846 ; 10.219,14.872 10.499,14.872 ; 10.219,16.827 10.372,16.827 ; 10.219,16.853 10.346,16.853 ; 10.219,17.843 10.321,17.843 ; 10.219,17.869 10.321,17.869 ; 10.219,17.894 10.321,17.894 ; 10.219,17.92 10.321,17.92 ; 10.219,17.945 10.321,17.945 ; 10.219,17.97 10.295,17.97 ; 10.219,17.996 10.295,17.996 ; 10.219,18.021 10.295,18.021 ; 10.219,18.047 10.295,18.047 ; 10.219,18.072 10.295,18.072 ; 10.219,18.097 10.295,18.097 ; 10.219,18.123 10.295,18.123 ; 10.219,18.148 10.295,18.148 ; 10.219,21.298 10.448,21.298 ; 10.219,21.958 10.321,21.958 ; 10.219,24.651 10.397,24.651 ; 10.245,14.211 10.778,14.211 ; 10.245,14.897 10.448,14.897 ; 10.245,14.922 10.397,14.922 ; 10.245,16.777 10.397,16.777 ; 10.245,16.802 10.372,16.802 ; 10.245,17.691 10.346,17.691 ; 10.245,17.716 10.346,17.716 ; 10.245,17.742 10.346,17.742 ; 10.245,17.767 10.321,17.767 ; 10.245,17.793 10.321,17.793 ; 10.245,17.818 10.321,17.818 ; 10.245,21.78 10.346,21.78 ; 10.245,21.806 10.651,21.806 ; 10.245,21.831 10.6,21.831 ; 10.245,21.857 10.422,21.857 ; 10.245,21.882 10.346,21.882 ; 10.245,21.907 10.321,21.907 ; 10.245,21.933 10.321,21.933 ; 10.245,21.984 10.321,21.984 ; 10.245,22.009 10.321,22.009 ; 10.245,22.034 10.321,22.034 ; 10.245,22.06 10.321,22.06 ; 10.245,22.085 10.321,22.085 ; 10.245,22.111 10.6,22.111 ; 10.245,22.136 10.499,22.136 ; 10.245,24.676 10.422,24.676 ; 10.27,14.948 10.397,14.948 ; 10.27,14.973 10.422,14.973 ; 10.27,16.726 10.397,16.726 ; 10.27,16.751 10.397,16.751 ; 10.27,17.64 10.397,17.64 ; 10.27,17.666 10.372,17.666 ; 10.27,20.002 11.972,20.002 ; 10.27,21.272 10.524,21.272 ; 10.27,21.704 10.397,21.704 ; 10.27,21.73 10.372,21.73 ; 10.27,21.755 10.346,21.755 ; 10.27,22.161 10.422,22.161 ; 10.27,22.187 10.372,22.187 ; 10.27,23.025 10.372,23.025 ; 10.27,23.05 10.372,23.05 ; 10.27,23.076 10.372,23.076 ; 10.27,23.101 10.372,23.101 ; 10.27,23.127 10.372,23.127 ; 10.27,23.152 10.372,23.152 ; 10.27,23.177 10.372,23.177 ; 10.27,23.203 10.372,23.203 ; 10.27,23.228 10.372,23.228 ; 10.27,23.254 10.372,23.254 ; 10.27,23.279 10.372,23.279 ; 10.27,23.304 10.372,23.304 ; 10.27,23.33 10.372,23.33 ; 10.27,24.701 10.448,24.701 ; 10.295,13.906 10.651,13.906 ; 10.295,14.999 10.422,14.999 ; 10.295,15.024 10.448,15.024 ; 10.295,16.675 10.422,16.675 ; 10.295,16.7 10.422,16.7 ; 10.295,17.615 10.448,17.615 ; 10.295,20.536 11.845,20.536 ; 10.295,21.653 10.448,21.653 ; 10.295,21.679 10.422,21.679 ; 10.295,22.212 10.397,22.212 ; 10.295,22.238 10.422,22.238 ; 10.295,22.873 10.397,22.873 ; 10.295,22.898 10.397,22.898 ; 10.295,22.923 10.397,22.923 ; 10.295,22.949 10.372,22.949 ; 10.295,22.974 10.372,22.974 ; 10.295,23 10.372,23 ; 10.295,23.355 10.372,23.355 ; 10.295,23.381 10.372,23.381 ; 10.295,23.406 10.372,23.406 ; 10.295,23.431 10.397,23.431 ; 10.295,23.457 10.397,23.457 ; 10.295,23.482 10.397,23.482 ; 10.295,24.727 10.499,24.727 ; 10.321,14.186 10.753,14.186 ; 10.321,15.049 10.448,15.049 ; 10.321,15.075 10.448,15.075 ; 10.321,16.624 10.448,16.624 ; 10.321,16.65 10.448,16.65 ; 10.321,17.056 10.88,17.056 ; 10.321,17.589 10.524,17.589 ; 10.321,21.247 10.626,21.247 ; 10.321,21.628 10.473,21.628 ; 10.321,22.263 10.473,22.263 ; 10.321,22.822 10.448,22.822 ; 10.321,22.847 10.422,22.847 ; 10.321,23.508 10.422,23.508 ; 10.321,23.533 10.422,23.533 ; 10.321,23.558 10.448,23.558 ; 10.321,24.752 10.549,24.752 ; 10.346,15.1 10.473,15.1 ; 10.346,15.126 10.473,15.126 ; 10.346,16.548 10.829,16.548 ; 10.346,16.573 10.905,16.573 ; 10.346,16.599 10.93,16.599 ; 10.346,17.564 10.626,17.564 ; 10.346,21.603 10.6,21.603 ; 10.346,22.288 12.226,22.288 ; 10.346,22.771 10.473,22.771 ; 10.346,22.796 10.448,22.796 ; 10.346,23.584 10.448,23.584 ; 10.346,23.609 10.473,23.609 ; 10.346,24.778 10.626,24.778 ; 10.372,13.932 10.6,13.932 ; 10.372,14.821 10.626,14.821 ; 10.372,15.151 10.499,15.151 ; 10.372,15.176 10.499,15.176 ; 10.372,15.202 10.499,15.202 ; 10.372,16.497 10.499,16.497 ; 10.372,16.523 10.727,16.523 ; 10.372,21.222 10.829,21.222 ; 10.372,21.78 10.803,21.78 ; 10.372,22.085 10.727,22.085 ; 10.372,22.314 11.032,22.314 ; 10.372,22.746 10.524,22.746 ; 10.372,23.635 10.499,23.635 ; 10.397,14.795 11.134,14.795 ; 10.397,15.227 10.524,15.227 ; 10.397,15.253 10.524,15.253 ; 10.397,16.421 10.524,16.421 ; 10.397,16.446 10.524,16.446 ; 10.397,16.472 10.499,16.472 ; 10.397,17.539 10.854,17.539 ; 10.397,21.577 10.651,21.577 ; 10.397,22.339 10.803,22.339 ; 10.397,22.72 10.549,22.72 ; 10.397,23.66 10.549,23.66 ; 10.397,24.803 11.692,24.803 ; 10.422,13.957 10.575,13.957 ; 10.422,13.983 10.6,13.983 ; 10.422,15.278 10.524,15.278 ; 10.422,15.303 10.549,15.303 ; 10.422,15.329 11.311,15.329 ; 10.422,15.354 10.803,15.354 ; 10.422,16.319 10.549,16.319 ; 10.422,16.345 10.549,16.345 ; 10.422,16.37 10.549,16.37 ; 10.422,16.396 10.524,16.396 ; 10.422,17.031 12.073,17.031 ; 10.422,21.552 10.778,21.552 ; 10.422,22.695 10.6,22.695 ; 10.422,23.685 11.972,23.685 ; 10.448,13.094 10.956,13.094 ; 10.448,14.008 10.6,14.008 ; 10.448,14.77 11.108,14.77 ; 10.448,15.38 10.676,15.38 ; 10.448,15.405 10.626,15.405 ; 10.448,15.43 10.575,15.43 ; 10.448,15.456 10.575,15.456 ; 10.448,16.243 10.575,16.243 ; 10.448,16.269 10.575,16.269 ; 10.448,16.294 10.549,16.294 ; 10.448,19.977 11.819,19.977 ; 10.448,20.51 11.692,20.51 ; 10.448,21.196 11.794,21.196 ; 10.448,22.06 10.88,22.06 ; 10.448,22.669 10.651,22.669 ; 10.448,23.711 11.057,23.711 ; 10.448,24.828 10.854,24.828 ; 10.473,14.033 10.626,14.033 ; 10.473,15.481 10.575,15.481 ; 10.473,15.507 10.575,15.507 ; 10.473,15.532 10.6,15.532 ; 10.473,15.557 10.6,15.557 ; 10.473,15.583 10.6,15.583 ; 10.473,16.091 10.6,16.091 ; 10.473,16.116 10.6,16.116 ; 10.473,16.142 10.6,16.142 ; 10.473,16.167 10.575,16.167 ; 10.473,16.192 10.575,16.192 ; 10.473,16.218 10.575,16.218 ; 10.473,17.513 12.073,17.513 ; 10.473,21.526 10.956,21.526 ; 10.473,21.755 11.134,21.755 ; 10.473,22.365 10.676,22.365 ; 10.473,23.736 10.803,23.736 ; 10.499,13.856 10.727,13.856 ; 10.499,14.059 10.651,14.059 ; 10.499,14.16 10.727,14.16 ; 10.499,15.608 10.6,15.608 ; 10.499,15.634 10.6,15.634 ; 10.499,15.659 10.6,15.659 ; 10.499,15.684 10.6,15.684 ; 10.499,15.71 10.6,15.71 ; 10.499,15.735 10.6,15.735 ; 10.499,15.761 10.6,15.761 ; 10.499,15.786 10.6,15.786 ; 10.499,15.811 10.6,15.811 ; 10.499,15.837 10.6,15.837 ; 10.499,15.862 10.6,15.862 ; 10.499,15.888 11.007,15.888 ; 10.499,15.913 11.083,15.913 ; 10.499,15.938 11.134,15.938 ; 10.499,15.964 10.676,15.964 ; 10.499,15.989 10.6,15.989 ; 10.499,16.015 10.6,16.015 ; 10.499,16.04 10.6,16.04 ; 10.499,16.065 10.6,16.065 ; 10.499,22.644 10.753,22.644 ; 10.499,24.854 10.753,24.854 ; 10.524,14.084 10.676,14.084 ; 10.524,14.745 11.108,14.745 ; 10.524,21.628 10.6,21.628 ; 10.524,21.653 10.6,21.653 ; 10.524,21.679 10.6,21.679 ; 10.524,21.704 10.6,21.704 ; 10.524,21.73 12.048,21.73 ; 10.524,21.857 10.6,21.857 ; 10.524,21.882 10.6,21.882 ; 10.524,21.907 10.6,21.907 ; 10.524,21.933 10.6,21.933 ; 10.524,21.958 10.6,21.958 ; 10.524,21.984 10.6,21.984 ; 10.524,22.009 10.6,22.009 ; 10.524,22.034 11.134,22.034 ; 10.524,22.136 10.6,22.136 ; 10.524,22.161 10.6,22.161 ; 10.524,22.187 10.6,22.187 ; 10.524,22.212 10.6,22.212 ; 10.524,22.238 10.626,22.238 ; 10.524,22.263 10.626,22.263 ; 10.524,22.619 10.88,22.619 ; 10.524,23.762 10.676,23.762 ; 10.549,13.83 10.753,13.83 ; 10.549,14.11 10.702,14.11 ; 10.549,14.135 10.702,14.135 ; 10.549,17.488 11.972,17.488 ; 10.549,21.171 11.692,21.171 ; 10.575,13.805 10.803,13.805 ; 10.575,17.005 11.972,17.005 ; 10.575,21.501 11.87,21.501 ; 10.575,24.879 10.778,24.879 ; 10.6,13.119 11.007,13.119 ; 10.6,15.303 11.108,15.303 ; 10.6,22.593 11.261,22.593 ; 10.626,13.779 10.829,13.779 ; 10.651,14.262 10.803,14.262 ; 10.651,19.952 11.616,19.952 ; 10.651,22.009 11.946,22.009 ; 10.651,24.905 10.778,24.905 ; 10.651,24.93 10.803,24.93 ; 10.676,13.754 10.854,13.754 ; 10.676,14.287 10.829,14.287 ; 10.676,14.719 10.854,14.719 ; 10.676,15.278 11.032,15.278 ; 10.676,22.568 12.632,22.568 ; 10.676,24.955 10.854,24.955 ; 10.702,13.729 10.88,13.729 ; 10.702,14.313 10.829,14.313 ; 10.702,14.338 10.854,14.338 ; 10.702,15.862 10.905,15.862 ; 10.702,20.485 11.438,20.485 ; 10.702,21.145 11.54,21.145 ; 10.702,21.476 11.794,21.476 ; 10.702,22.898 10.803,22.898 ; 10.702,22.923 10.803,22.923 ; 10.702,22.949 10.803,22.949 ; 10.702,22.974 10.778,22.974 ; 10.702,23 10.778,23 ; 10.702,23.025 10.778,23.025 ; 10.702,23.05 10.778,23.05 ; 10.702,23.076 10.778,23.076 ; 10.702,23.101 10.778,23.101 ; 10.702,23.127 10.778,23.127 ; 10.702,23.152 10.778,23.152 ; 10.702,23.177 10.778,23.177 ; 10.702,23.203 10.803,23.203 ; 10.702,23.228 10.803,23.228 ; 10.702,24.778 11.388,24.778 ; 10.702,24.981 11.388,24.981 ; 10.727,13.144 11.057,13.144 ; 10.727,13.703 10.905,13.703 ; 10.727,14.364 10.88,14.364 ; 10.727,16.624 10.981,16.624 ; 10.727,21.704 12.073,21.704 ; 10.727,22.263 12.15,22.263 ; 10.727,22.822 10.829,22.822 ; 10.727,22.847 10.829,22.847 ; 10.727,22.873 10.803,22.873 ; 10.727,23.254 10.803,23.254 ; 10.727,23.279 10.803,23.279 ; 10.727,23.304 10.829,23.304 ; 10.727,23.33 10.829,23.33 ; 10.727,23.66 11.896,23.66 ; 10.727,25.006 11.362,25.006 ; 10.753,14.389 10.88,14.389 ; 10.753,16.98 11.845,16.98 ; 10.753,17.462 11.819,17.462 ; 10.753,22.771 10.88,22.771 ; 10.753,22.796 10.854,22.796 ; 10.753,23.355 10.854,23.355 ; 10.753,23.381 10.88,23.381 ; 10.753,25.032 10.981,25.032 ; 10.778,13.678 10.93,13.678 ; 10.778,14.414 10.905,14.414 ; 10.778,14.44 10.93,14.44 ; 10.778,22.542 12.581,22.542 ; 10.778,22.746 11.159,22.746 ; 10.778,23.406 10.956,23.406 ; 10.778,24.752 11.311,24.752 ; 10.778,25.057 10.93,25.057 ; 10.803,13.652 10.956,13.652 ; 10.803,14.465 10.93,14.465 ; 10.803,21.984 11.946,21.984 ; 10.803,22.72 12.505,22.72 ; 10.803,23 11.007,23 ; 10.803,23.025 11.007,23.025 ; 10.803,23.05 11.007,23.05 ; 10.803,23.076 11.007,23.076 ; 10.803,23.101 11.007,23.101 ; 10.803,23.127 11.007,23.127 ; 10.803,23.152 11.007,23.152 ; 10.803,23.177 11.007,23.177 ; 10.803,23.431 12.556,23.431 ; 10.803,25.971 10.956,25.971 ; 10.803,25.997 10.93,25.997 ; 10.803,26.022 10.93,26.022 ; 10.803,26.048 10.905,26.048 ; 10.803,26.073 10.905,26.073 ; 10.803,26.098 10.905,26.098 ; 10.803,26.124 10.93,26.124 ; 10.803,26.149 10.93,26.149 ; 10.803,26.175 10.956,26.175 ; 10.829,13.17 11.083,13.17 ; 10.829,13.627 10.981,13.627 ; 10.829,14.491 10.956,14.491 ; 10.829,14.516 10.981,14.516 ; 10.829,16.65 11.007,16.65 ; 10.829,22.695 12.454,22.695 ; 10.829,23.457 12.531,23.457 ; 10.829,25.082 10.93,25.082 ; 10.829,25.108 10.93,25.108 ; 10.829,25.133 10.956,25.133 ; 10.829,25.159 10.956,25.159 ; 10.829,25.184 10.956,25.184 ; 10.829,25.946 11.007,25.946 ; 10.829,26.2 11.007,26.2 ; 10.854,13.602 11.007,13.602 ; 10.854,14.541 10.981,14.541 ; 10.854,14.567 11.007,14.567 ; 10.854,16.954 11.692,16.954 ; 10.854,25.209 10.956,25.209 ; 10.854,25.235 10.956,25.235 ; 10.854,25.26 10.956,25.26 ; 10.854,25.286 10.956,25.286 ; 10.854,25.311 10.956,25.311 ; 10.854,25.336 10.956,25.336 ; 10.854,25.362 10.956,25.362 ; 10.854,25.387 10.981,25.387 ; 10.854,25.413 10.981,25.413 ; 10.854,25.438 10.981,25.438 ; 10.854,25.921 11.235,25.921 ; 10.854,26.225 11.235,26.225 ; 10.854,26.251 11.21,26.251 ; 10.88,13.576 11.032,13.576 ; 10.88,14.592 11.007,14.592 ; 10.88,16.675 11.134,16.675 ; 10.88,16.904 11.032,16.904 ; 10.88,16.929 11.007,16.929 ; 10.88,21.45 11.667,21.45 ; 10.88,24.955 11.159,24.955 ; 10.88,25.463 10.981,25.463 ; 10.88,25.489 10.981,25.489 ; 10.88,25.514 10.981,25.514 ; 10.88,25.54 10.981,25.54 ; 10.88,25.565 10.981,25.565 ; 10.88,25.59 10.981,25.59 ; 10.88,25.616 10.981,25.616 ; 10.88,25.641 11.007,25.641 ; 10.88,25.667 11.007,25.667 ; 10.88,25.692 11.007,25.692 ; 10.88,25.895 11.21,25.895 ; 10.905,13.195 11.108,13.195 ; 10.905,13.525 11.057,13.525 ; 10.905,13.551 11.032,13.551 ; 10.905,14.618 11.032,14.618 ; 10.905,14.643 11.057,14.643 ; 10.905,14.821 11.134,14.821 ; 10.905,16.878 11.032,16.878 ; 10.905,22.238 12.048,22.238 ; 10.905,22.669 12.226,22.669 ; 10.905,23.482 12.48,23.482 ; 10.905,25.717 11.007,25.717 ; 10.905,25.743 11.007,25.743 ; 10.905,25.768 11.007,25.768 ; 10.905,25.794 11.007,25.794 ; 10.905,25.819 11.007,25.819 ; 10.905,25.844 11.007,25.844 ; 10.905,25.87 11.184,25.87 ; 10.905,26.276 11.184,26.276 ; 10.93,13.5 11.083,13.5 ; 10.93,14.668 11.057,14.668 ; 10.93,14.694 11.083,14.694 ; 10.93,15.354 11.311,15.354 ; 10.93,15.964 11.184,15.964 ; 10.93,16.7 11.134,16.7 ; 10.93,16.827 11.083,16.827 ; 10.93,16.853 11.057,16.853 ; 10.93,23.635 11.718,23.635 ; 10.956,13.221 11.134,13.221 ; 10.956,13.449 11.108,13.449 ; 10.956,13.475 11.083,13.475 ; 10.956,14.719 11.083,14.719 ; 10.956,16.726 11.134,16.726 ; 10.956,16.777 11.108,16.777 ; 10.956,16.802 11.083,16.802 ; 10.956,21.679 11.692,21.679 ; 10.956,26.302 11.134,26.302 ; 10.981,13.424 11.108,13.424 ; 10.981,16.751 11.108,16.751 ; 11.007,13.246 11.159,13.246 ; 11.007,13.348 11.134,13.348 ; 11.007,13.373 11.134,13.373 ; 11.007,13.398 11.108,13.398 ; 11.007,14.846 11.159,14.846 ; 11.007,15.989 11.21,15.989 ; 11.032,13.271 11.159,13.271 ; 11.032,13.297 11.159,13.297 ; 11.032,13.322 11.134,13.322 ; 11.032,14.872 11.159,14.872 ; 11.032,14.897 11.159,14.897 ; 11.032,15.38 11.311,15.38 ; 11.032,16.624 11.159,16.624 ; 11.032,16.65 11.159,16.65 ; 11.032,21.958 11.718,21.958 ; 11.032,22.517 12.48,22.517 ; 11.057,14.922 11.184,14.922 ; 11.057,14.948 11.184,14.948 ; 11.057,16.015 11.337,16.015 ; 11.057,16.573 11.184,16.573 ; 11.057,16.599 11.184,16.599 ; 11.057,21.526 11.134,21.526 ; 11.057,21.552 11.134,21.552 ; 11.057,21.577 11.134,21.577 ; 11.057,21.603 11.134,21.603 ; 11.057,21.628 11.134,21.628 ; 11.057,21.653 11.134,21.653 ; 11.057,21.78 11.134,21.78 ; 11.057,21.806 11.134,21.806 ; 11.057,21.831 11.134,21.831 ; 11.057,21.857 11.134,21.857 ; 11.057,21.882 11.134,21.882 ; 11.057,21.907 11.134,21.907 ; 11.057,21.933 11.134,21.933 ; 11.057,22.06 11.134,22.06 ; 11.057,22.085 11.134,22.085 ; 11.057,22.111 11.134,22.111 ; 11.057,22.136 11.134,22.136 ; 11.057,22.161 11.134,22.161 ; 11.057,22.187 11.134,22.187 ; 11.057,22.212 11.159,22.212 ; 11.083,14.973 11.21,14.973 ; 11.083,14.999 11.21,14.999 ; 11.083,16.497 11.21,16.497 ; 11.083,16.523 11.21,16.523 ; 11.083,16.548 11.21,16.548 ; 11.083,25.032 11.337,25.032 ; 11.083,25.641 11.21,25.641 ; 11.083,25.667 11.21,25.667 ; 11.083,25.692 11.21,25.692 ; 11.083,25.717 11.184,25.717 ; 11.083,25.743 11.184,25.743 ; 11.083,25.768 11.184,25.768 ; 11.083,25.794 11.184,25.794 ; 11.083,25.819 11.184,25.819 ; 11.083,25.844 11.184,25.844 ; 11.083,25.946 11.261,25.946 ; 11.083,26.2 11.261,26.2 ; 11.108,15.024 11.21,15.024 ; 11.108,15.049 11.235,15.049 ; 11.108,15.075 11.235,15.075 ; 11.108,16.04 11.337,16.04 ; 11.108,16.446 11.235,16.446 ; 11.108,16.472 11.235,16.472 ; 11.108,17.437 11.54,17.437 ; 11.108,25.413 11.235,25.413 ; 11.108,25.438 11.235,25.438 ; 11.108,25.463 11.21,25.463 ; 11.108,25.489 11.21,25.489 ; 11.108,25.514 11.21,25.514 ; 11.108,25.54 11.21,25.54 ; 11.108,25.565 11.21,25.565 ; 11.108,25.59 11.21,25.59 ; 11.108,25.616 11.21,25.616 ; 11.134,13.449 11.337,13.449 ; 11.134,13.475 11.286,13.475 ; 11.134,13.5 11.261,13.5 ; 11.134,13.525 11.235,13.525 ; 11.134,13.551 11.235,13.551 ; 11.134,13.576 11.235,13.576 ; 11.134,13.602 11.261,13.602 ; 11.134,13.627 11.261,13.627 ; 11.134,13.652 11.261,13.652 ; 11.134,15.1 11.235,15.1 ; 11.134,15.126 11.261,15.126 ; 11.134,15.151 11.261,15.151 ; 11.134,15.405 11.311,15.405 ; 11.134,16.37 11.261,16.37 ; 11.134,16.396 11.261,16.396 ; 11.134,16.421 11.235,16.421 ; 11.134,25.133 11.261,25.133 ; 11.134,25.159 11.261,25.159 ; 11.134,25.184 11.261,25.184 ; 11.134,25.209 11.235,25.209 ; 11.134,25.235 11.235,25.235 ; 11.134,25.26 11.235,25.26 ; 11.134,25.286 11.235,25.286 ; 11.134,25.311 11.235,25.311 ; 11.134,25.336 11.235,25.336 ; 11.134,25.362 11.235,25.362 ; 11.134,25.387 11.235,25.387 ; 11.134,25.971 11.261,25.971 ; 11.134,26.175 11.261,26.175 ; 11.159,13.424 11.438,13.424 ; 11.159,13.678 11.286,13.678 ; 11.159,13.703 11.286,13.703 ; 11.159,15.176 11.261,15.176 ; 11.159,15.202 11.286,15.202 ; 11.159,15.227 11.286,15.227 ; 11.159,16.065 11.337,16.065 ; 11.159,16.269 11.286,16.269 ; 11.159,16.294 11.286,16.294 ; 11.159,16.319 11.286,16.319 ; 11.159,16.345 11.261,16.345 ; 11.159,25.057 11.286,25.057 ; 11.159,25.082 11.261,25.082 ; 11.159,25.108 11.261,25.108 ; 11.159,25.997 11.286,25.997 ; 11.159,26.022 11.286,26.022 ; 11.159,26.124 11.286,26.124 ; 11.159,26.149 11.286,26.149 ; 11.184,13.398 11.565,13.398 ; 11.184,13.729 11.311,13.729 ; 11.184,13.754 11.311,13.754 ; 11.184,15.253 11.286,15.253 ; 11.184,15.278 11.286,15.278 ; 11.184,15.303 11.311,15.303 ; 11.184,15.43 11.337,15.43 ; 11.184,16.091 11.337,16.091 ; 11.184,16.167 11.311,16.167 ; 11.184,16.192 11.311,16.192 ; 11.184,16.218 11.311,16.218 ; 11.184,16.243 11.286,16.243 ; 11.184,16.929 11.413,16.929 ; 11.184,21.425 11.413,21.425 ; 11.184,26.048 11.286,26.048 ; 11.184,26.073 11.286,26.073 ; 11.184,26.098 11.286,26.098 ; 11.21,13.779 11.337,13.779 ; 11.21,13.805 11.362,13.805 ; 11.21,15.456 11.337,15.456 ; 11.21,15.481 11.337,15.481 ; 11.21,16.116 11.311,16.116 ; 11.21,16.142 11.311,16.142 ; 11.21,23.406 11.845,23.406 ; 11.235,13.373 11.769,13.373 ; 11.235,13.83 11.362,13.83 ; 11.235,13.856 11.388,13.856 ; 11.235,15.507 11.337,15.507 ; 11.235,15.532 11.337,15.532 ; 11.235,15.557 11.337,15.557 ; 11.235,15.583 11.337,15.583 ; 11.235,15.608 11.337,15.608 ; 11.235,15.634 11.337,15.634 ; 11.235,15.659 11.337,15.659 ; 11.235,15.684 11.337,15.684 ; 11.235,15.71 11.362,15.71 ; 11.235,15.735 11.362,15.735 ; 11.235,15.761 11.362,15.761 ; 11.235,15.786 11.362,15.786 ; 11.235,15.811 11.362,15.811 ; 11.235,15.837 11.337,15.837 ; 11.235,15.862 11.337,15.862 ; 11.235,15.888 11.337,15.888 ; 11.235,15.913 11.337,15.913 ; 11.235,15.938 11.337,15.938 ; 11.235,15.964 11.337,15.964 ; 11.235,15.989 11.337,15.989 ; 11.235,23.381 11.819,23.381 ; 11.235,24.828 11.642,24.828 ; 11.235,24.955 11.413,24.955 ; 11.261,13.881 11.413,13.881 ; 11.286,13.348 13.013,13.348 ; 11.286,13.906 11.438,13.906 ; 11.286,13.932 11.438,13.932 ; 11.286,20.561 11.997,20.561 ; 11.286,23.355 11.769,23.355 ; 11.286,24.93 11.413,24.93 ; 11.311,13.957 11.464,13.957 ; 11.311,24.879 11.515,24.879 ; 11.311,24.905 11.438,24.905 ; 11.337,13.983 11.489,13.983 ; 11.337,23.33 11.743,23.33 ; 11.337,24.854 11.591,24.854 ; 11.362,13.322 12.937,13.322 ; 11.362,14.008 11.54,14.008 ; 11.362,23.304 11.692,23.304 ; 11.388,14.033 11.565,14.033 ; 11.388,22.746 11.667,22.746 ; 11.413,14.059 11.591,14.059 ; 11.413,22.771 11.642,22.771 ; 11.413,23.279 11.667,23.279 ; 11.438,14.084 11.616,14.084 ; 11.438,21.222 11.87,21.222 ; 11.438,22.796 11.616,22.796 ; 11.464,14.11 11.667,14.11 ; 11.464,22.822 11.591,22.822 ; 11.464,23.254 11.642,23.254 ; 11.464,24.778 11.743,24.778 ; 11.489,13.297 12.835,13.297 ; 11.489,14.135 11.692,14.135 ; 11.489,20.028 12.099,20.028 ; 11.489,21.755 11.946,21.755 ; 11.489,22.847 11.591,22.847 ; 11.489,22.873 11.616,22.873 ; 11.515,14.16 11.743,14.16 ; 11.515,22.898 11.616,22.898 ; 11.54,22.923 11.616,22.923 ; 11.54,22.949 11.642,22.949 ; 11.54,22.974 11.642,22.974 ; 11.54,23.228 11.642,23.228 ; 11.54,24.752 11.769,24.752 ; 11.565,14.186 11.794,14.186 ; 11.565,16.929 11.718,16.929 ; 11.565,23 11.642,23 ; 11.565,23.025 11.642,23.025 ; 11.565,23.05 11.642,23.05 ; 11.565,23.076 11.642,23.076 ; 11.565,23.101 11.642,23.101 ; 11.565,23.127 11.642,23.127 ; 11.565,23.152 11.642,23.152 ; 11.565,23.177 11.642,23.177 ; 11.565,23.203 11.642,23.203 ; 11.591,14.211 11.845,14.211 ; 11.591,16.904 11.743,16.904 ; 11.591,20.587 12.099,20.587 ; 11.591,21.247 11.946,21.247 ; 11.591,24.727 11.794,24.727 ; 11.616,16.878 11.769,16.878 ; 11.616,21.526 11.946,21.526 ; 11.616,21.552 11.692,21.552 ; 11.616,21.577 11.692,21.577 ; 11.616,21.603 11.692,21.603 ; 11.616,21.628 11.692,21.628 ; 11.616,21.653 11.692,21.653 ; 11.616,21.78 11.692,21.78 ; 11.616,21.806 11.692,21.806 ; 11.616,21.831 11.692,21.831 ; 11.616,21.857 11.692,21.857 ; 11.616,21.882 11.692,21.882 ; 11.616,21.907 11.692,21.907 ; 11.616,21.933 11.692,21.933 ; 11.616,22.034 11.946,22.034 ; 11.616,22.06 11.692,22.06 ; 11.616,22.085 11.692,22.085 ; 11.616,22.111 11.692,22.111 ; 11.616,22.136 11.692,22.136 ; 11.616,22.161 11.692,22.161 ; 11.616,22.187 11.692,22.187 ; 11.616,22.212 11.692,22.212 ; 11.616,23.711 12.429,23.711 ; 11.642,14.237 11.972,14.237 ; 11.642,16.827 11.819,16.827 ; 11.642,16.853 11.794,16.853 ; 11.642,24.701 11.819,24.701 ; 11.667,14.262 11.972,14.262 ; 11.667,16.802 11.819,16.802 ; 11.667,24.676 11.845,24.676 ; 11.692,13.271 12.708,13.271 ; 11.692,16.777 11.845,16.777 ; 11.718,14.287 11.972,14.287 ; 11.718,16.751 11.87,16.751 ; 11.718,17.056 12.175,17.056 ; 11.718,17.539 12.175,17.539 ; 11.718,20.053 12.2,20.053 ; 11.718,21.272 11.997,21.272 ; 11.718,24.651 11.87,24.651 ; 11.743,16.726 11.896,16.726 ; 11.743,21.552 11.972,21.552 ; 11.743,24.625 11.896,24.625 ; 11.769,16.675 11.921,16.675 ; 11.769,16.7 11.896,16.7 ; 11.769,20.612 12.2,20.612 ; 11.769,23 11.946,23 ; 11.769,23.025 11.946,23.025 ; 11.769,23.05 11.946,23.05 ; 11.769,23.076 11.946,23.076 ; 11.769,23.101 11.946,23.101 ; 11.769,23.127 11.946,23.127 ; 11.769,23.152 11.946,23.152 ; 11.769,23.177 11.946,23.177 ; 11.769,24.574 11.921,24.574 ; 11.769,24.6 11.896,24.6 ; 11.794,14.313 11.972,14.313 ; 11.794,16.65 11.946,16.65 ; 11.794,21.298 12.023,21.298 ; 11.794,21.78 11.946,21.78 ; 11.794,24.549 11.946,24.549 ; 11.819,16.624 11.972,16.624 ; 11.819,21.577 11.972,21.577 ; 11.819,22.314 12.251,22.314 ; 11.819,23.736 12.353,23.736 ; 11.819,24.524 11.946,24.524 ; 11.845,14.338 11.997,14.338 ; 11.845,16.573 12.277,16.573 ; 11.845,16.599 11.972,16.599 ; 11.845,21.603 11.946,21.603 ; 11.845,21.628 11.921,21.628 ; 11.845,21.653 12.099,21.653 ; 11.845,21.679 12.099,21.679 ; 11.845,21.806 11.946,21.806 ; 11.845,21.831 11.946,21.831 ; 11.845,21.857 11.946,21.857 ; 11.845,21.882 11.946,21.882 ; 11.845,21.907 11.946,21.907 ; 11.845,21.933 11.946,21.933 ; 11.845,21.958 11.946,21.958 ; 11.845,22.06 11.946,22.06 ; 11.845,22.085 11.946,22.085 ; 11.845,22.111 11.946,22.111 ; 11.845,22.136 11.946,22.136 ; 11.845,22.161 11.946,22.161 ; 11.845,22.187 11.946,22.187 ; 11.845,22.212 11.946,22.212 ; 11.845,24.473 11.972,24.473 ; 11.845,24.498 11.972,24.498 ; 11.87,14.364 11.997,14.364 ; 11.87,16.548 12.226,16.548 ; 11.87,21.323 12.048,21.323 ; 11.87,24.397 11.997,24.397 ; 11.87,24.422 11.997,24.422 ; 11.87,24.447 11.997,24.447 ; 11.896,14.186 12.048,14.186 ; 11.896,14.211 11.997,14.211 ; 11.896,14.389 12.023,14.389 ; 11.896,14.414 12.023,14.414 ; 11.896,16.497 12.048,16.497 ; 11.896,16.523 12.15,16.523 ; 11.896,17.081 12.251,17.081 ; 11.896,17.564 12.226,17.564 ; 11.896,20.079 12.302,20.079 ; 11.896,24.346 12.023,24.346 ; 11.896,24.371 12.023,24.371 ; 11.921,14.16 12.099,14.16